# Altium PCB JacdacHub 39.PcbDoc
Units mm, origin at the board's own origin, x right, y up, seen from the top; angles counter-clockwise.
Board outline 24.18 x 46.54 mm, 2 copper layers (Top Layer, Bottom Layer), stack 1.525 mm thick; 20 components, 3 nets, 144 pads, 10 vias.
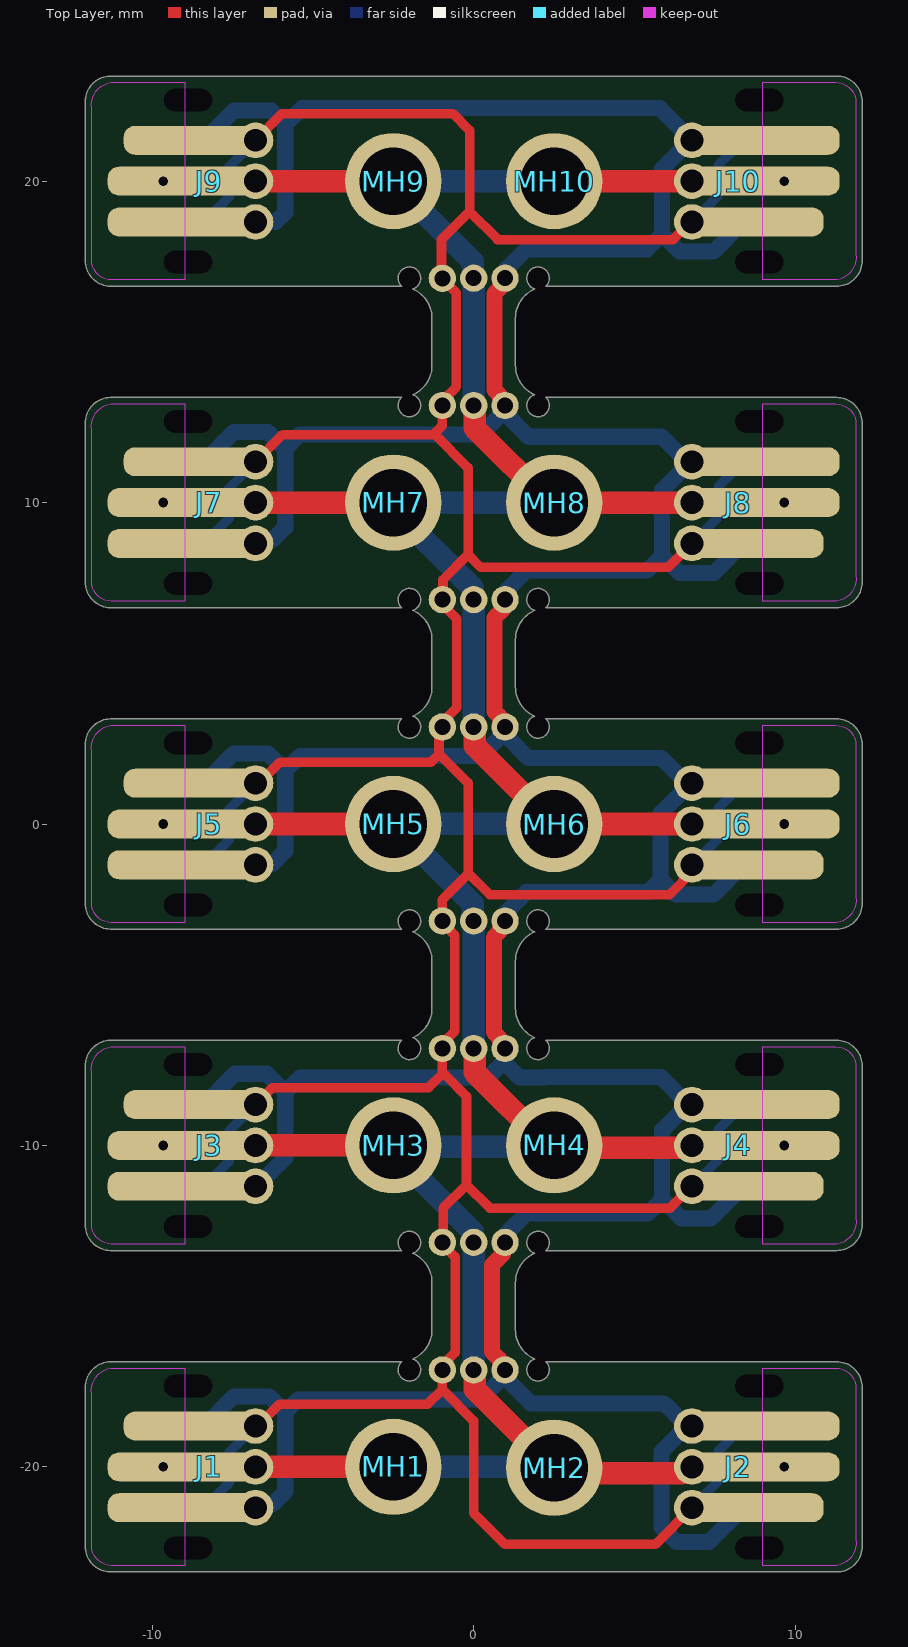
[diagram p0: Top Layer view]
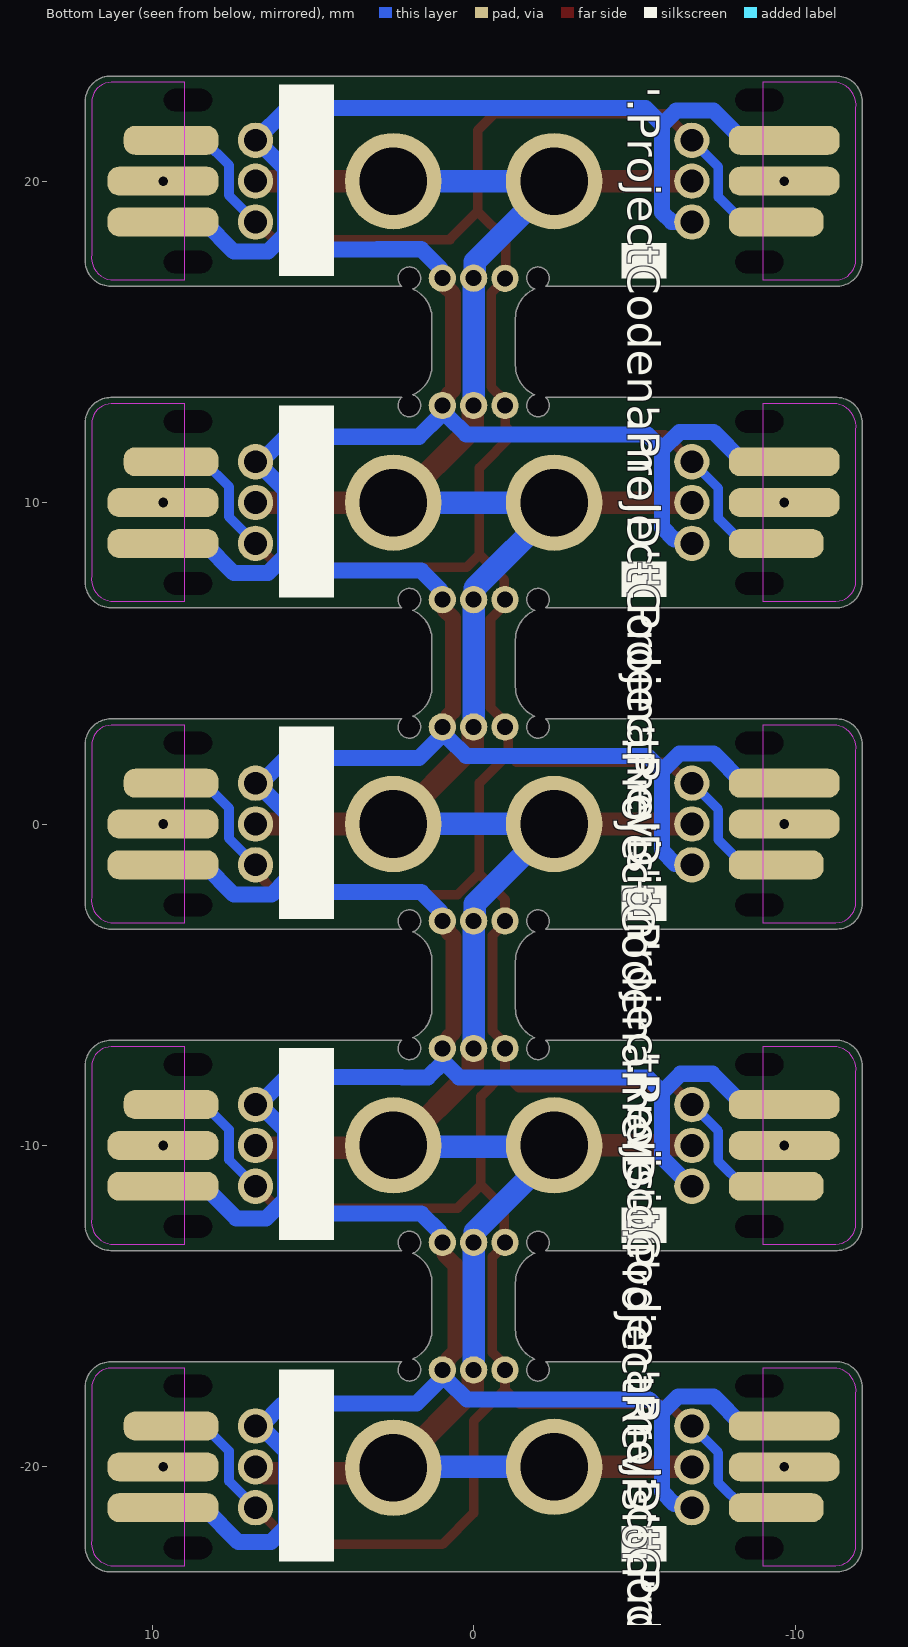
[diagram p1: Bottom Layer view, seen from below]

## Layer stack, top to bottom
Top Solder: solder mask 0.0102, Solder Resist, Dk 3.5
Top Layer: signal copper 0.0356
Dielectric 1: core 1.454, FR-4, Dk 4.2
Bottom Layer: signal copper 0.0356
Bottom Solder: solder mask 0.0102, Solder Resist, Dk 3.5

## Board outline
-12.088,-22.47 ccw(c-11.287,-22.469) -11.313,-23.27 11.288,-23.27 ccw(c11.288,-22.471) 12.087,-22.47 12.087,-17.53 ccw(c11.288,-17.529) 11.288,-16.73 2.331,-16.73 cw(c2.309,-14.857) 2.244,-16.729 cw(c2.001,-16.98) 1.897,-16.646 cw(c2.298,-15.73) 1.298,-15.73 1.298,-14.27 cw(c2.298,-14.27) 1.897,-13.354 cw(c2.001,-13.02) 2.244,-13.271 cw(c2.309,-15.142) 2.331,-13.27 11.288,-13.27 ccw(c11.288,-12.471) 12.087,-12.47 12.087,-7.53 ccw(c11.288,-7.529) 11.288,-6.73 2.331,-6.73 cw(c2.309,-4.856) 2.244,-6.729 cw(c2.001,-6.98) 1.897,-6.646 cw(c2.298,-5.73) 1.298,-5.73 1.298,-4.27 cw(c2.298,-4.27) 1.897,-3.354 cw(c2.001,-3.02) 2.244,-3.271 cw(c2.309,-5.137) 2.331,-3.27 11.288,-3.27 ccw(c11.288,-2.471) 12.087,-2.47 12.087,2.47 ccw(c11.288,2.471) 11.288,3.27 2.331,3.27 cw(c2.309,5.142) 2.244,3.271 cw(c2.001,3.02) 1.897,3.354 cw(c2.298,4.27) 1.298,4.27 1.298,5.73 cw(c2.298,5.73) 1.897,6.646 cw(c2.001,6.98) 2.244,6.729 cw(c2.309,4.863) 2.331,6.73 11.288,6.73 ccw(c11.288,7.529) 12.087,7.53 12.087,12.47 ccw(c11.288,12.471) 11.288,13.27 2.331,13.27 cw(c2.309,15.14) 2.244,13.271 cw(c2.001,13.02) 1.897,13.354 cw(c2.298,14.27) 1.298,14.27 1.298,15.73 cw(c2.298,15.73) 1.897,16.646 cw(c2.001,16.98) 2.244,16.729 cw(c2.309,14.864) 2.331,16.73 11.288,16.73 ccw(c11.288,17.529) 12.087,17.53 12.087,22.47 ccw(c11.288,22.471) 11.288,23.27 -11.313,23.27 ccw(c-11.287,22.469) -12.088,22.47 -12.088,17.53 ccw(c-11.287,17.531) -11.313,16.73 -2.331,16.73 cw(c-2.309,14.864) -2.244,16.729 cw(c-2.001,16.98) -1.897,16.646 cw(c-2.298,15.73) -1.298,15.73 -1.298,14.27 cw(c-2.298,14.27) -1.897,13.354 cw(c-2.001,13.02) -2.244,13.271 cw(c-2.309,15.141) -2.331,13.27 -11.313,13.27 ccw(c-11.287,12.469) -12.088,12.47 -12.088,7.53 ccw(c-11.287,7.531) -11.313,6.73 -2.331,6.73 cw(c-2.309,4.863) -2.244,6.729 cw(c-2.001,6.98) -1.897,6.646 cw(c-2.298,5.73) -1.298,5.73 -1.298,4.27 cw(c-2.298,4.27) -1.897,3.354 cw(c-2.001,3.02) -2.244,3.271 cw(c-2.309,5.142) -2.331,3.27 -11.313,3.27 ccw(c-11.287,2.469) -12.088,2.47 -12.088,-2.47 ccw(c-11.287,-2.469) -11.313,-3.27 -2.331,-3.27 cw(c-2.309,-5.137) -2.244,-3.271 cw(c-2.001,-3.02) -1.897,-3.354 cw(c-2.298,-4.27) -1.298,-4.27 -1.298,-5.73 cw(c-2.298,-5.73) -1.897,-6.646 cw(c-2.001,-6.98) -2.244,-6.729 cw(c-2.309,-4.856) -2.331,-6.73 -11.313,-6.73 ccw(c-11.287,-7.531) -12.088,-7.53 -12.088,-12.47 ccw(c-11.287,-12.469) -11.313,-13.27 -2.331,-13.27 cw(c-2.309,-15.138) -2.244,-13.271 cw(c-2.001,-13.02) -1.897,-13.354 cw(c-2.298,-14.27) -1.298,-14.27 -1.298,-15.73 cw(c-2.298,-15.73) -1.897,-16.646 cw(c-2.001,-16.98) -2.244,-16.729 cw(c-2.309,-14.858) -2.331,-16.73 -11.313,-16.73 ccw(c-11.287,-17.531) -12.088,-17.53

## Design rules (kind name [scope] priority, off if disabled: settings)
AssemblyTestPointUsage [All] p1: valid=2
BoardOutlineClearance [All] p1: gap=0.3 ignorepadtopadclearanceinfootprint=FALSE except(0: Arc-SplitContinuation Track-SplitContinuation SMDPad-SplitContinuation THPad-SplitContinuation Via-SplitContinuation Fill-SplitContinuation Poly-SplitContinuation Region-OutlineEdge Region-SplitContinuation Text-OutlineEdge Text-SplitContinuation; 0.25: THPad-OutlineEdge Fill-OutlineEdge Poly-OutlineEdge)
Clearance [All] p1: gap=0.125 ignorepadtopadclearanceinfootprint=FALSE except(0: Arc-Hole Track-Hole SMDPad-Hole THPad-Hole Via-Hole Fill-Hole Poly-Hole Region-Hole Text-Hole)
DiffPairsRouting [All] p1: maxlimit=2 minlimit=0.15 mostfreqgap=0.15 toplayer_minwidth=0.15 toplayer_maxwidth=2 toplayer_prefwidth=0.15 bottomlayer_minwidth=0.15 bottomlayer_maxwidth=2 bottomlayer_prefwidth=0.15 substack1={CB9D278B-8BF5-444A-AAF4-837A2A9DF42D} toplayer_{cb9d278b-8bf5-444a-aaf4-837a2a9df42d}_minwidth=0.381 toplayer_{cb9d278b-8bf5-444a-aaf4-837a2a9df42d}_maxwidth=0.381 toplayer_{cb9d278b-8bf5-444a-aaf4-837a2a9df42d}_prefwidth=0.381 bottomlayer_{cb9d278b-8bf5-444a-aaf4-837a2a9df42d}_minwidth=0.381 bottomlayer_{cb9d278b-8bf5-444a-aaf4-837a2a9df42d}_maxwidth=0.381 bottomlayer_{cb9d278b-8bf5-444a-aaf4-837a2a9df42d}_prefwidth=0.381 substack2={826B8647-A721-4255-895A-19F9591B9CD1} toplayer_{826b8647-a721-4255-895a-19f9591b9cd1}_minwidth=0.381 toplayer_{826b8647-a721-4255-895a-19f9591b9cd1}_maxwidth=0.381 toplayer_{826b8647-a721-4255-895a-19f9591b9cd1}_prefwidth=0.381 bottomlayer_{826b8647-a721-4255-895a-19f9591b9cd1}_minwidth=0.381 bottomlayer_{826b8647-a721-4255-895a-19f9591b9cd1}_maxwidth=0.381 bottomlayer_{826b8647-a721-4255-895a-19f9591b9cd1}_prefwidth=0.381 substack3={E64FCAF4-1BC8-437D-B1E0-0E5F2DC0F59E} toplayer_{e64fcaf4-1bc8-437d-b1e0-0e5f2dc0f59e}_minwidth=0.381 toplayer_{e64fcaf4-1bc8-437d-b1e0-0e5f2dc0f59e}_maxwidth=0.381 toplayer_{e64fcaf4-1bc8-437d-b1e0-0e5f2dc0f59e}_prefwidth=0.381 bottomlayer_{e64fcaf4-1bc8-437d-b1e0-0e5f2dc0f59e}_minwidth=0.381 bottomlayer_{e64fcaf4-1bc8-437d-b1e0-0e5f2dc0f59e}_maxwidth=0.381 bottomlayer_{e64fcaf4-1bc8-437d-b1e0-0e5f2dc0f59e}_prefwidth=0.381 substack4={E61CE66C-507C-4E1E-8E83-C905434AFC1C} toplayer_{e61ce66c-507c-4e1e-8e83-c905434afc1c}_minwidth=0.381 toplayer_{e61ce66c-507c-4e1e-8e83-c905434afc1c}_maxwidth=0.381 toplayer_{e61ce66c-507c-4e1e-8e83-c905434afc1c}_prefwidth=0.381 bottomlayer_{e61ce66c-507c-4e1e-8e83-c905434afc1c}_minwidth=0.381 bottomlayer_{e61ce66c-507c-4e1e-8e83-c905434afc1c}_maxwidth=0.381 bottomlayer_{e61ce66c-507c-4e1e-8e83-c905434afc1c}_prefwidth=0.381 maxuncoupledlength=25
FabricationTestPointUsage [All] p1: valid=2 allowmultiple=FALSE
HoleSize [All] p1: absolutevalues=TRUE maxlimit=2.54 minlimit=0.2 maxpercent=80.000 minpercent=20.000
MinimumSolderMaskSliver [All] p1: minsoldermaskwidth=0.005
PlaneClearance [All] p1: clearance=0.3
PlaneConnect [All] p1: planeconnectstyle=Relief reliefexpansion=0.5 reliefentries=4 reliefconductorwidth=0.2 reliefairgap=0.3
PolygonConnect "PolygonConnect GND" [isVIA] p1: connectstyle=Relief reliefconductorwidth=0.2 reliefentries=4 polygonreliefangle="90 Angle" airgapwidth=0.2
PolygonConnect [All] p2: connectstyle=Relief reliefconductorwidth=0.2 reliefentries=4 polygonreliefangle="90 Angle" airgapwidth=0.2
RoutingVias [All] p1: holewidth=0.3 width=0.6 viastyle="Through Hole" minholewidth=0.3 minwidth=0.6 maxholewidth=1 maxwidth=1.5
ShortCircuit ShortCircuit_J10_J11 [InComponent('J10') vs InComponent('J11')] p1: allowed=TRUE
ShortCircuit [All] p2: allowed=FALSE
SilkToSilkClearance [All] p1: silktosilkclearance=0.001
SilkToSolderMaskClearance [IsPad] p1: minsilkscreentomaskgap=0.05 clearancetoexposedcopper=TRUE
SolderMaskExpansion [All] p1: expansion=0.075 istentingtop=FALSE
Width [All] p1: maxlimit=2 minlimit=0.15 preferedwidth=0.15 substack1={CB9D278B-8BF5-444A-AAF4-837A2A9DF42D} substack2={826B8647-A721-4255-895A-19F9591B9CD1} substack3={E64FCAF4-1BC8-437D-B1E0-0E5F2DC0F59E} substack4={E61CE66C-507C-4E1E-8E83-C905434AFC1C} minimp=50.000000 maximp=50.000000 favimp=50.000000
20 further rules are at their usual default settings.

## Components (designator, comment, footprint, x,y, rotation, side; value= is the part's Value field where it differs from the comment)
J1 "3 pin JACDAC edge connector" JACDAC_EDGE_CONNECTOR_NO_TRACES -6.238,-20 r90 top
J2 "3 pin JACDAC edge connector" JACDAC_EDGE_CONNECTOR_NO_TRACES 6.237,-20 r270 top
J3 "3 pin JACDAC edge connector" JACDAC_EDGE_CONNECTOR_NO_TRACES -6.237,-10 r90 top
J4 "3 pin JACDAC edge connector" JACDAC_EDGE_CONNECTOR_NO_TRACES 6.237,-10 r270 top
J5 "3 pin JACDAC edge connector" JACDAC_EDGE_CONNECTOR_NO_TRACES -6.237,0 r90 top
J6 "3 pin JACDAC edge connector" JACDAC_EDGE_CONNECTOR_NO_TRACES 6.237,0 r270 top
J7 "3 pin JACDAC edge connector" JACDAC_EDGE_CONNECTOR_NO_TRACES -6.237,10 r90 top
J8 "3 pin JACDAC edge connector" JACDAC_EDGE_CONNECTOR_NO_TRACES 6.237,10 r270 top
J9 "3 pin JACDAC edge connector" JACDAC_EDGE_CONNECTOR_NO_TRACES -6.238,20 r90 top
J10 "3 pin JACDAC edge connector" JACDAC_EDGE_CONNECTOR_NO_TRACES 6.237,20 r270 top
MH1 "MH_5.0MMK_3.0MMC_2.1MMD_PTH" MH_5.0MMK_3.0MMC_2.1MMD_PTH_NO_NOTES#1 -2.5,-20 r0 top
MH2 "MH_5.0MMK_3.0MMC_2.1MMD_PTH" MH_5.0MMK_3.0MMC_2.1MMD_PTH_NO_NOTES#1 2.5,-20.025 r0 top
MH3 "MH_5.0MMK_3.0MMC_2.1MMD_PTH" MH_5.0MMK_3.0MMC_2.1MMD_PTH_NO_NOTES#2 -3,-10 r0 top
MH4 "MH_5.0MMK_3.0MMC_2.1MMD_PTH" MH_5.0MMK_3.0MMC_2.1MMD_PTH_NO_NOTES#3 3,-10 r0 top
MH5 "MH_5.0MMK_3.0MMC_2.1MMD_PTH" MH_5.0MMK_3.0MMC_2.1MMD_PTH_NO_NOTES#2 -3,0 r0 top
MH6 "MH_5.0MMK_3.0MMC_2.1MMD_PTH" MH_5.0MMK_3.0MMC_2.1MMD_PTH_NO_NOTES#3 3,0 r0 top
MH7 "MH_5.0MMK_3.0MMC_2.1MMD_PTH" MH_5.0MMK_3.0MMC_2.1MMD_PTH_NO_NOTES#2 -3,10 r0 top
MH8 "MH_5.0MMK_3.0MMC_2.1MMD_PTH" MH_5.0MMK_3.0MMC_2.1MMD_PTH_NO_NOTES#3 3,10 r0 top
MH9 "MH_5.0MMK_3.0MMC_2.1MMD_PTH" MH_5.0MMK_3.0MMC_2.1MMD_PTH_NO_NOTES#2 -3,20 r0 top
MH10 "MH_5.0MMK_3.0MMC_2.1MMD_PTH" MH_5.0MMK_3.0MMC_2.1MMD_PTH_NO_NOTES#4 3,20 r90 top

## Footprints (in the part's own frame and the unit in brackets; to place one, negate y for a bottom-side part, rotate by r counter-clockwise, add the part's x,y. Pads: shape width x height; smd on the part's side, far side on the other; paste and mask are expansions set on the pad)
JACDAC_EDGE_CONNECTOR_NO_TRACES [mm] "JacDac 3 pin connector with no traces"
  rrect78% 0.9x2.95 smd far side paste-1 mask+0: 1(-1.27,3.175)
  rrect78% 0.9x4.3 smd paste-1 mask+0: 1(1.27,2.5)
  round 1.11 / inner round 0.71 / far side round 1.1 hole 0.71 paste-0.254 mask+0: 1(1.27,0.55) 2(0,0.55) 3(-1.27,0.55)
  rrect78% 0.9x3.45 smd far side paste-1 mask+0: 2(0,3.425) 3(1.27,3.425)
  rrect78% 0.9x4.8 smd paste-1 mask+0: 2(0,2.75) 3(-1.27,2.75)
  round 0 hole 0.7 slot 1.5 at 90 deg unplated: ""(-2.52,2.65) ""(2.52,2.65)
  Top Layer keep-out region: -3.075,2.75 -3.07,5.033 -2.987,5.341 -2.761,5.567 -2.453,5.65 -2.453,5.65 2.27,5.65 2.545,5.635 2.794,5.516 2.978,5.31 3.07,5.05 3.07,5.05 3.07,2.75
  Bottom Layer lines w0.2: -1.27,0.85 -1.126,0.85
  Bottom Layer keep-out region: -3.07,2.75 -3.07,5.033 -3.023,5.269 -2.889,5.469 -2.689,5.603 -2.453,5.65 -2.453,5.65 2.27,5.65 2.545,5.635 2.794,5.516 2.978,5.31 3.07,5.05 3.07,5.05 3.07,2.75
MH_5.0MMK_3.0MMC_2.1MMD_PTH_NO_NOTES#1 [mm] "Mounting Hole 5.0mm clearance, 3.1 annualar ring and 2.1mm PTH"
  round 3 hole 2.1 mask+0.05: 1(0,0)
MH_5.0MMK_3.0MMC_2.1MMD_PTH_NO_NOTES#2 [mm] "Mounting Hole 5.0mm clearance, 3.1 annualar ring and 2.1mm PTH"
  round 3 hole 2.1 mask+0.05: 1(0.5,0)
MH_5.0MMK_3.0MMC_2.1MMD_PTH_NO_NOTES#3 [mm] "Mounting Hole 5.0mm clearance, 3.1 annualar ring and 2.1mm PTH"
  round 3 hole 2.1 mask+0.05: 1(-0.5,0)
MH_5.0MMK_3.0MMC_2.1MMD_PTH_NO_NOTES#4 [mm] "Mounting Hole 5.0mm clearance, 3.1 annualar ring and 2.1mm PTH"
  round 3 hole 2.1 mask+0.05: 1(0,0.5)

## Part data
J1 J2 J3 J4 J5 J6 J7 J8 J9 J10: library part "Jacdac edge connector", "3 pin Jacdac edge connector 1.27mm pitch", Manufacturer Part Number=JACDAC_EDGE_CONNECTOR, Checked By=?, ComponentLink1Description="Yuliang JACDAC cable connector drawing online", ComponentLink1URL=https://github.com/microsoft/jacdac-mdk/blob/main/connector/JACDAC-Connector-by-Yuliang-2020-11-28.pdf, ComponentLink2Description="JACDAC PCB edge connector spec onlin", ComponentLink2URL=https://github.com/microsoft/jacdac-mdk/blob/main/connector/JACDAC_PCB_Edge_Connector_Drawing_JD-PEC-01_rev_01.pdf, Created By="D. Gakure", PCB Type="1.6mm FR4"
MH1 MH2 MH3 MH4 MH5 MH6 MH7 MH8 MH9 MH10: "Mounting Hole 5.0mm keepout, 3.0mm annualar ring and 2.1mm Drill PTH"

## Free pads (board coordinates)
  round 0.85 hole 0.5: 1(-0.975,-16.984) 1(-0.975,-13.016) 1(-0.975,-6.984) 1(-0.975,-3.016) 1(-0.975,3.02) 1(-0.975,6.98) 1(-0.975,13.02) 1(-0.975,16.975) 2(0,-16.984) 2(0,-13.016) 2(0,-6.984) 2(0,-3.016) 2(0,3.02) 2(0,6.98) 2(0,13.02) 2(0,16.98) 3(0.975,-16.984) 3(0.975,-13.016) 3(0.975,-6.984) 3(0.975,-3.016) 3(0.975,3.02) 3(0.975,6.98) 3(0.975,13.02) 3(0.975,16.98)

## Via types
v1: diameter 0.6, hole 0.3, Top Layer to Bottom Layer, tented both sides, 10 vias

## Nets (pads, with @x,y where several pads share a name; then routed paths per layer and width w, separated by ;. In a path a pad name is that pad's centre, name@x,y a point inside that pad or via, vN(x,y) a via of type N, cw(c..) or ccw(c..) an arc to the next point about the centre after c; other vN are vias at no path point)
GND: J1.2 J2.2 J3.2 J4.2 J5.2 J6.2 J7.2 J8.2 J9.2 J10.2 MH1.1 MH2.1 MH3.1 MH4.1 MH5.1 MH6.1 MH7.1 MH8.1 MH9.1 MH10.1 pad.2 | length 118.5
  Top Layer w0.7: J3.2@-6.787,-10 MH3.1 ; J5.2@-6.787,0 MH5.1 MH5.1@-2,0 ; J7.2@-6.787,10 MH7.1@-2,10 ; J9.2@-6.788,20 MH9.1@-2,20 ; J1.2@-6.785,-19.998 MH1.1@-2.502,-19.998 ; pad.2@0,-16.984 0.029,-17.013 0.029,-17.581 MH2.1@2.33,-19.882 ; pad.2@0,-6.984 0.029,-7.012 0.029,-7.723 2.306,-10 MH4.1 2.567,-10.067 6.721,-10.067 J4.2@6.787,-10 ; pad.2@0,3.02 0.029,2.991 0.029,2.439 MH6.1@2.468,0 ; pad.2@0,13.02 0.029,12.991 0.029,12.323 MH8.1@2.352,10 ; MH10.1@2,20 J10.2@6.787,20 ; MH2.1 2.674,-20.199 6.477,-20.199 6.677,-20 J2.2@6.787,-20 ; MH6.1 J6.2@6.787,0 ; MH8.1 MH8.1@2.352,10 ; J8.2@6.787,10 MH8.1@2.352,10
  Bottom Layer w0.7: MH3.1 -2.5,-10.22 -0.869,-11.851 -0.867,-11.851 -0.029,-12.69 -0.029,-12.987 0,-13.016 pad.2@0,-16.984 ; MH5.1@-2.5,-0.017 -0.029,-2.489 -0.029,-2.988 0,-3.016 pad.2@0,-6.984 ; MH9.1@-2.5,19.962 -0.029,17.49 -0.029,17.009 0,16.98 pad.2@0,13.02 ; MH9.1 MH10.1 ; MH5.1@-2.485,0.015 MH6.1@2.485,0.015 ; MH1.1@-2.481,-20 MH2.1@2.655,-20 ; MH3.1@-2.459,-10.041 MH4.1@2.459,-10.041 ; pad.2@0,3.02 0,6.98 -0.029,7.009 -0.029,7.334 -2.5,9.805 MH7.1 MH8.1
  other v1: -9.663,-20 9.663,-20 -9.663,-10 9.663,-10 -9.663,0 9.663,0 -9.663,10 9.663,10 -9.663,20 9.663,20
JD_DATA: J1.1 J2.1 J3.1 J4.1 J5.1 J6.1 J7.1 J8.1 J9.1 J10.1 pad.1 | length 159.7
  Top Layer w0.2: J8.1@6.588,8.73 J8.1@6.787,8.73
  Top Layer w0.3: J1.1@-6.788,-18.73 -6.726,-18.73 -6.046,-18.05 -1.433,-18.05 -0.975,-17.592 ; J3.1@-6.787,-8.73 -6.257,-8.2 -1.4,-8.2 -1.01,-7.81 -0.886,-7.81 -0.225,-8.471 -0.225,-11.225 ; J5.1@-6.787,1.27 -6.676,1.27 -6.021,1.925 -1.325,1.925 -1.08,2.17 -1.08,2.18 ; J9.1@-6.788,21.27 -5.958,22.1 -0.65,22.1 -0.125,21.575 -0.125,19.054 ; J7.1@-6.646,11.27 -6.787,11.27 -5.946,12.111 -1.21,12.111 -0.175,11.076 -0.175,8.38 ; -1.238,12.111 -1.238,12.129 -0.98,12.387 -0.98,13 pad.1@-0.975,13.005 ; -0.975,-7.721 -0.975,-6.835 -0.585,-6.444 -0.585,-3.467 -0.975,-3.076 -0.975,-2.353 -0.175,-1.553 -0.175,1.275 -1.08,2.18 ; pad.1@-0.975,13.02 -0.975,13.169 -0.542,13.602 -0.542,16.524 -0.975,16.957 -0.975,16.975 -1,17 -1,18.179 -0.125,19.054 ; -0.175,-1.524 0.503,-2.201 6.087,-2.201 6.492,-1.796 6.492,-1.784 6.787,-1.489 J6.1@6.787,-1.27 ; J2.1@6.787,-21.27 5.649,-22.408 0.975,-22.408 0,-21.433 0,-18.567 -0.975,-17.592 ; J4.1@6.787,-11.27 6.108,-11.95 0.5,-11.95 -0.225,-11.225 ; J8.1@6.787,8.73 6.044,7.986 0.219,7.986 -0.175,8.38 ; J10.1@6.787,18.73 6.758,18.73 6.207,18.179 0.733,18.179 0.733,18.195 -0.125,19.054 ; -1.08,2.18 -1.08,2.915 -0.975,3.02 -0.975,3.169 -0.522,3.621 -0.522,6.379 -0.975,6.831 -0.975,6.98 -0.956,6.999 -0.956,7.599 -0.175,8.38 ; -0.975,-17.592 -0.975,-16.835 -0.579,-16.44 -0.579,-13.467 -0.975,-13.071 -0.975,-13.016 -0.95,-12.991 -0.95,-11.95 -0.225,-11.225
  Bottom Layer w0.3: J1.1@-9.413,-21.27 -8.388,-21.27 -7.613,-20.495 -7.613,-19.555 J1.1@-6.788,-18.73 ; J3.1@-9.413,-11.27 -8.388,-11.27 -7.613,-10.495 -7.613,-9.555 J3.1@-6.787,-8.73 ; J5.1@-9.413,-1.27 -8.388,-1.27 -7.613,-0.495 -7.613,0.445 J5.1@-6.787,1.27 ; J7.1@-9.413,8.73 -8.388,8.73 -7.613,9.505 -7.613,10.445 J7.1@-6.787,11.27 ; J9.1@-9.413,18.73 -8.388,18.73 -7.613,19.505 -7.613,20.445 J9.1@-6.788,21.27 ; J2.1@6.787,-21.27 7.613,-20.445 7.613,-19.505 8.388,-18.73 J2.1@9.413,-18.73 ; J4.1@6.787,-11.27 7.613,-10.445 7.613,-9.505 8.388,-8.73 J4.1@9.413,-8.73 ; J6.1@6.787,-1.27 7.613,-0.445 7.613,0.495 8.388,1.27 J6.1@9.413,1.27 ; J8.1@6.787,8.73 7.613,9.555 7.613,10.495 8.388,11.27 J8.1@9.413,11.27 ; J10.1@6.787,18.73 7.613,19.555 7.613,20.495 8.388,21.27 J10.1@9.413,21.27
JD_PWR: J1.3 J2.3 J3.3 J4.3 J5.3 J6.3 J7.3 J8.3 J9.3 J10.3 pad.3 | length 186.2
  Top Layer w0.34: J2.3@6.655,-18.597 J2.3@6.787,-18.73
  Top Layer w0.5: pad.3@0.975,-16.984 0.975,-16.889 0.8,-16.714 0.8,-16.653 0.566,-16.419 0.566,-13.723 0.908,-13.381 0.908,-13.083 pad.3@0.975,-13.016 ; pad.3@0.975,-6.984 0.975,-6.889 0.8,-6.714 0.8,-6.652 0.625,-6.477 0.625,-3.523 0.8,-3.348 0.8,-3.286 0.975,-3.111 pad.3@0.975,-3.016 ; pad.3@0.975,3.02 0.975,3.115 0.8,3.29 0.8,3.351 0.645,3.506 0.645,6.409 0.908,6.672 0.908,6.913 pad.3@0.975,6.98 ; pad.3@0.975,13.02 0.975,13.115 0.8,13.29 0.8,13.351 0.642,13.51 0.642,16.49 0.908,16.757 0.908,16.913 pad.3@0.975,16.98
  Bottom Layer w0.34: J5.3@-6.787,-1.27 J5.3@-6.692,-1.27
  Bottom Layer w0.5: J1.3@-9.663,-18.73 -8.388,-18.73 -7.463,-17.805 -6.365,-17.805 -5.863,-18.307 ; J3.3@-9.663,-8.73 -8.388,-8.73 -7.428,-7.77 -6.439,-7.77 -5.862,-8.347 ; J5.3@-9.663,1.27 -8.388,1.27 -7.462,2.195 -6.404,2.195 -5.862,1.653 ; J7.3@-9.663,11.27 -8.388,11.27 -7.462,12.195 -6.404,12.195 -5.862,11.653 ; J9.3@-9.663,21.27 -8.388,21.27 -7.463,22.195 -6.302,22.195 -5.862,21.756 ; J1.3@-6.788,-21.27 -6.673,-21.155 -6.247,-21.155 -5.863,-20.771 -5.863,-18.307 ; J3.3@-6.787,-11.27 -6.749,-11.27 -5.862,-10.383 -5.862,-8.347 ; J7.3@-6.787,8.73 -6.673,8.845 -6.247,8.845 -5.862,9.229 -5.862,11.653 ; J9.3@-6.788,18.73 -6.155,18.73 -5.862,19.023 -5.862,21.756 ; J5.3@-6.268,-1.245 -5.862,-0.84 -5.862,1.653 ; pad.3@0.8,-17.315 0.214,-17.901 -5.457,-17.901 -5.863,-18.307 ; pad.3@0.8,2.689 0.232,2.12 -5.395,2.12 -5.862,1.653 ; pad.3@0.8,12.689 0.232,12.12 -5.405,12.12 -5.862,11.663 -5.862,11.653 ; pad.3@0.975,-16.984 1.042,-17.051 1.042,-17.291 1.775,-18.025 5.889,-18.025 5.907,-18.043 5.938,-18.043 6.625,-18.73 J2.3@6.787,-18.73 ; pad.3@0.975,-13.016 1.042,-12.949 1.042,-12.709 1.63,-12.12 5.417,-12.12 5.862,-11.675 ; pad.3@0.975,-6.984 0.975,-7.358 pad.3@0.938,-7.396 ; pad.3@0.975,-3.016 1.042,-2.949 1.042,-2.709 1.63,-2.12 5.417,-2.12 5.814,-1.723 ; pad.3@0.975,3.02 1.042,2.953 1.042,2.709 1.704,2.047 5.848,2.047 6.625,1.27 J6.3@6.749,1.27 ; pad.3@0.975,6.98 1.042,7.047 1.042,7.291 1.63,7.88 5.395,7.88 5.862,8.347 ; pad.3@0.975,13.02 1.042,12.953 1.042,12.709 1.704,12.047 5.848,12.047 6.625,11.27 J8.3@6.749,11.27 ; pad.3@0.975,16.98 1.042,17.047 1.042,17.291 1.63,17.88 2.995,17.88 3,17.875 5.391,17.875 5.862,18.347 ; J2.3@6.395,-18.967 5.836,-19.526 5.836,-21.865 6.31,-22.339 7.319,-22.339 8.388,-21.27 J2.3@9.663,-21.27 ; J4.3@6.787,-8.73 J4.3@6.679,-8.73 ; J6.3@6.787,1.27 J6.3@6.749,1.27 ; J8.3@6.787,11.27 J8.3@6.749,11.27 ; J4.3@9.663,-11.27 8.388,-11.27 7.388,-12.27 6.458,-12.27 5.862,-11.675 ; J6.3@9.663,-1.27 8.388,-1.27 7.462,-2.195 6.286,-2.195 5.814,-1.723 ; J8.3@9.663,8.73 8.388,8.73 7.462,7.805 6.404,7.805 5.862,8.347 ; J10.3@9.663,18.73 8.388,18.73 7.462,17.805 6.404,17.805 5.862,18.347 ; -5.862,-8.347 -5.395,-7.88 0.454,-7.88 pad.3@0.938,-7.396 ; -5.862,21.756 -5.348,22.27 5.788,22.27 6.787,21.27 6.749,21.27 5.862,20.383 5.862,18.347 ; pad.3@0.938,-7.396 1.422,-7.88 2.222,-7.88 2.237,-7.865 5.814,-7.865 J4.3@6.679,-8.73 ; 5.814,-1.723 5.814,0.335 J6.3@6.749,1.27 ; 5.862,-11.675 5.862,-9.523 6.656,-8.73 J4.3@6.679,-8.73 ; 5.862,8.347 5.862,10.383 J8.3@6.749,11.27
pads on no net: J1. J2. J3. J4. J5. J6. J7. J8. J9. J10.

## Other copper
Top Layer:
  text "Top Layer" at 30.376,23.7 h1.7
Bottom Layer:
  text "Bottom Layer" at 30.375,22.2 h1.7

## Silkscreen, mask and mechanical layers (free items; w line width, h text height)
Top Overlay:
  text "Top Overlay" at 30.376,15.4 h1.7
Bottom Overlay:
  region: 4.35,-6.975 4.35,-12.949 6.05,-12.949 6.05,-6.975
  region: -6,-11.934 -6,-13.034 -4.6,-13.034 -4.6,-11.934
  region: 4.35,-16.975 4.35,-22.949 6.05,-22.949 6.05,-16.975
  region: 4.35,3.025 4.35,-2.949 6.05,-2.949 6.05,3.025
  region: 4.35,13.025 4.35,7.051 6.05,7.051 6.05,13.025
  region: 4.35,23 4.35,17.05 6.05,17.05 6.05,23
  region: -6,18.072 -6,16.972 -4.6,16.972 -4.6,18.072
  region: -6,8.163 -6,7.063 -4.6,7.063 -4.6,8.163
  region: -6,-21.837 -6,-22.937 -4.6,-22.937 -4.6,-21.837
  region: -6,-1.915 -6,-3.015 -4.6,-3.015 -4.6,-1.915
  text "'.ProjectCodenameID'-'.ProjectRevision'" at -4.8,22.95 h1 r90
  text "Bottom Overlay" at 30.375,13.9 h1.7
  text "'.ProjectCodenameID'-'.ProjectRevision'" at -4.8,13.05 h1 r90
  text "'.ProjectCodenameID'-'.ProjectRevision'" at -4.64,3.11 h1 r90
  text "'.ProjectCodenameID'-'.ProjectRevision'" at -4.8,-7.05 h1 r90
  text "'.ProjectCodenameID'-'.ProjectRevision'" at -4.8,-16.95 h1 r90
Top Paste:
  text "Top Paste" at 30.376,12.493 h1.7
Bottom Paste:
  text "Bottom Paste" at 30.375,11.015 h1.7
Top Solder:
  text "Top Solder (resist)" at 30.376,9.693 h1.7
Bottom Solder:
  text "Bottom Solder (resist)" at 30.375,8.202 h1.7
Mechanical 1:
  circle w0.013: c6.787,-18.73 r0.355
  circle w0.013: c6.787,-21.27 r0.355
  circle w0.013: c6.787,-20 r0.355
  circle w0.013: c2.5,-20 r1.05
  circle w0.013: c0.975,-16.98 r0.25
  circle w0.013: c0.975,-13.02 r0.25
  circle w0.013: c0,-13.02 r0.25
  circle w0.013: c6.787,-11.27 r0.355
  circle w0.013: c6.787,-8.73 r0.355
  circle w0.013: c6.787,-10 r0.355
  circle w0.013: c2.5,-10 r1.05
  circle w0.013: c0.975,-6.98 r0.25
  circle w0.013: c0.975,-3.025 r0.25
  circle w0.013: c0,-6.98 r0.25
  circle w0.013: c6.787,-1.27 r0.355
  circle w0.013: c-0.975,-16.98 r0.25
  circle w0.013: c0,-16.98 r0.25
  circle w0.013: c-0.975,-13.02 r0.25
  circle w0.013: c-2.5,-10 r1.05
  circle w0.013: c-2.5,-20 r1.05
  circle w0.013: c-6.788,-20 r0.355
  circle w0.013: c-6.788,-21.27 r0.355
  circle w0.013: c-6.788,-8.73 r0.355
  circle w0.013: c-6.788,-18.73 r0.355
  circle w0.013: c-6.788,-10 r0.355
  circle w0.013: c-6.788,-11.27 r0.355
  circle w0.013: c0,-3.02 r0.25
  circle w0.013: c-0.975,-3.02 r0.25
  circle w0.013: c-0.975,-6.98 r0.25
  circle w0.013: c-6.788,-1.27 r0.355
  circle w0.013: c-6.788,1.27 r0.355
  circle w0.013: c-0.975,6.98 r0.25
  circle w0.013: c-0.975,3.02 r0.25
  circle w0.013: c0,3.02 r0.25
  circle w0.013: c-6.788,11.27 r0.355
  circle w0.013: c-6.788,10 r0.355
  circle w0.013: c-6.788,18.73 r0.355
  circle w0.013: c-6.788,8.73 r0.355
  circle w0.013: c-6.788,21.27 r0.355
  circle w0.013: c-6.788,20 r0.355
  circle w0.013: c-2.5,20 r1.05
  circle w0.013: c-2.5,10 r1.05
  circle w0.013: c-0.975,13.02 r0.25
  circle w0.013: c0,16.98 r0.25
  circle w0.013: c-0.975,16.98 r0.25
  circle w0.013: c6.787,1.27 r0.355
  circle w0.013: c0,6.98 r0.25
  circle w0.013: c0.975,3.025 r0.25
  circle w0.013: c0.975,6.98 r0.25
  circle w0.013: c2.5,10 r1.05
  circle w0.013: c6.787,10 r0.355
  circle w0.013: c6.787,8.73 r0.355
  circle w0.013: c6.787,11.27 r0.355
  circle w0.013: c0,13.02 r0.25
  circle w0.013: c0.975,13.02 r0.25
  circle w0.013: c0.975,16.98 r0.25
  circle w0.013: c2.5,20 r1.05
  circle w0.013: c6.787,20 r0.355
  circle w0.013: c6.787,21.27 r0.355
  circle w0.013: c6.787,18.73 r0.355
  lines w0.013: -9.288,-22.87 cw(c-9.288,-22.52) -9.288,-22.17 -8.488,-22.17 cw(c-8.488,-22.52) -8.488,-22.87 -9.288,-22.87 ; -9.288,-17.83 cw(c-9.288,-17.48) -9.288,-17.13 -8.488,-17.13 cw(c-8.488,-17.48) -8.488,-17.83 -9.288,-17.83 ; -9.288,-12.87 cw(c-9.288,-12.52) -9.288,-12.17 -8.488,-12.17 cw(c-8.488,-12.52) -8.488,-12.87 -9.288,-12.87 ; -9.288,-7.83 cw(c-9.288,-7.48) -9.288,-7.13 -8.488,-7.13 cw(c-8.488,-7.48) -8.488,-7.83 -9.288,-7.83 ; -9.288,-2.87 cw(c-9.288,-2.52) -9.288,-2.17 -8.488,-2.17 cw(c-8.488,-2.52) -8.488,-2.87 -9.288,-2.87 ; -9.288,2.17 cw(c-9.288,2.52) -9.288,2.87 -8.488,2.87 cw(c-8.488,2.52) -8.488,2.17 -9.288,2.17 ; -9.288,7.13 cw(c-9.288,7.48) -9.288,7.83 -8.488,7.83 cw(c-8.488,7.48) -8.488,7.13 -9.288,7.13 ; -9.288,12.17 cw(c-9.288,12.52) -9.288,12.87 -8.488,12.87 cw(c-8.488,12.52) -8.488,12.17 -9.288,12.17 ; -9.288,17.13 cw(c-9.288,17.48) -9.288,17.83 -8.488,17.83 cw(c-8.488,17.48) -8.488,17.13 -9.288,17.13 ; -9.288,22.17 cw(c-9.288,22.52) -9.288,22.87 -8.488,22.87 cw(c-8.488,22.52) -8.488,22.17 -9.288,22.17 ; -7.143,0 ccw(c-6.788,0) -6.433,0 ccw(c-6.788,0) -7.143,0 ; -3.55,0 ccw(c-2.5,0) -1.45,0 ccw(c-2.5,0) -3.55,0 ; 1.45,0 ccw(c2.5,0) 3.55,0 ccw(c2.5,0) 1.45,0 ; 6.432,0 ccw(c6.787,0) 7.143,0 ccw(c6.787,0) 6.432,0 ; 8.487,-22.87 cw(c8.487,-22.52) 8.487,-22.17 9.287,-22.17 cw(c9.287,-22.52) 9.287,-22.87 8.487,-22.87 ; 8.487,-17.83 cw(c8.487,-17.48) 8.487,-17.13 9.287,-17.13 cw(c9.287,-17.48) 9.287,-17.83 8.487,-17.83 ; 8.487,-12.87 cw(c8.487,-12.52) 8.487,-12.17 9.287,-12.17 cw(c9.287,-12.52) 9.287,-12.87 8.487,-12.87 ; 8.487,-7.83 cw(c8.487,-7.48) 8.487,-7.13 9.287,-7.13 cw(c9.287,-7.48) 9.287,-7.83 8.487,-7.83 ; 8.488,-2.87 cw(c8.488,-2.52) 8.488,-2.17 9.287,-2.17 cw(c9.287,-2.52) 9.287,-2.87 8.488,-2.87 ; 8.488,2.17 cw(c8.488,2.52) 8.488,2.87 9.287,2.87 cw(c9.287,2.52) 9.287,2.17 8.488,2.17 ; 8.487,7.13 cw(c8.487,7.48) 8.487,7.83 9.287,7.83 cw(c9.287,7.48) 9.287,7.13 8.487,7.13 ; 8.487,12.17 cw(c8.487,12.52) 8.487,12.87 9.287,12.87 cw(c9.287,12.52) 9.287,12.17 8.487,12.17 ; 8.487,17.13 cw(c8.487,17.48) 8.487,17.83 9.287,17.83 cw(c9.287,17.48) 9.287,17.13 8.487,17.13 ; 8.487,22.17 cw(c8.487,22.52) 8.487,22.87 9.287,22.87 cw(c9.287,22.52) 9.287,22.17 8.487,22.17
Fab Notes:
  lines w0.1: -10.507,-16.657 -9.907,-17.257 ; -10.507,-11.707 -9.907,-12.307 ; -10.507,-1.582 -9.907,-2.182 ; -10.5,8.318 -9.9,7.718 ; -10.5,27.025 -10.5,23.4 ; -10.482,-6.607 -9.882,-7.207 ; -10.482,3.368 -9.882,2.768 ; -10.482,13.268 -9.882,12.668 ; -9.9,-22.45 -10.5,-21.85 -10.5,18.005 ; -9.9,17.405 -10.5,18.005 ; -9.775,22.675 -10.5,23.4 ; -8.049,24.468 -8.399,24.818 ; -8.049,25.168 -8.399,24.818 ; -5.425,-26 -5.425,27 ; -5.42,24.818 -8.399,24.818 ; 5.163,24.825 8.142,24.825 ; 5.175,-27 5.175,27 ; 7.791,24.475 8.142,24.825 ; 7.791,25.175 8.142,24.825 ; 9.543,22.757 10.268,23.482 ; 9.65,-7.125 10.25,-6.525 ; 9.65,2.85 10.25,3.45 ; 9.65,12.75 10.25,13.35 ; 9.668,-22.368 10.268,-21.768 10.268,18.087 ; 9.668,7.8 10.268,8.4 ; 9.668,17.487 10.268,18.087 ; 9.675,-17.175 10.275,-16.575 ; 9.675,-12.225 10.275,-11.625 ; 9.675,-2.1 10.275,-1.5 ; 10.268,27.075 10.268,23.482 ; -10.5,18.005 -10.5,23.4 ; 10.268,18.087 10.268,23.482
  text "no board edge pips/ / rat's teeth/mouse bites  / above  this line - make  / sure board edge is clean" at -2.875,27.3 h1.7 r90
  text "no board edge pips/ / rat's teeth/mouse bites  / below  this line - make  / sure board edge is clean" at 7.725,27.2 h1.7 r90
  text "non-plated slots x14" at 10.607,27.101 h1.7 r90
  text "non-plated slots x14" at -10.169,27.014 h1.7 r90
  text "Fabrication Notes" at 30.375,20.915 h1.7
Board Outline:
  the board outline again, w0.1
  text "Board Outline" at 30.375,19.615 h1.7
Top Assy:
  text "Top Assy" at 30.376,18.3 h1.7
Bottom Assy:
  text "Bottom Assy" at 30.375,16.9 h1.7

## Dimensions
-9.206,-3.27 to -9.105,3.27 on Dimension
-2.5,-20 to -2.5,20 on Dimension
0.675,23.275 to 0.225,-23.275 on Dimension
-2.5,20 to -2.5,10 on Dimension
-12.089,20.416 to 12.075,19.875 on Dimension
-2.5,20 to 2.5,20 on Dimension

## Text inside footprints (layer, text, board x,y; h text height)
J1: Alignment "board outline  / for 'outie'" at -7.101,-14.86 h1.2 r90; Alignment "board outline  / for 'innie'" at -4.256,-15.47 h1.2 r90; Mechanical 9 "Jacdac / cable connector  / body" at -16.245,-24.821 h1.7 r90
J2: Alignment "board outline  / for 'innie'" at 4.256,-24.53 h1.2 r270; Alignment "board outline  / for 'outie'" at 7.101,-25.14 h1.2 r270; Mechanical 9 "Jacdac / cable connector  / body" at 16.245,-15.179 h1.7 r270
J3: Alignment "board outline  / for 'innie'" at -4.256,-5.47 h1.2 r90; Alignment "board outline  / for 'outie'" at -7.101,-4.86 h1.2 r90; Mechanical 9 "Jacdac / cable connector  / body" at -16.245,-14.821 h1.7 r90
J4: Alignment "board outline  / for 'outie'" at 7.101,-15.14 h1.2 r270; Alignment "board outline  / for 'innie'" at 4.256,-14.53 h1.2 r270; Mechanical 9 "Jacdac / cable connector  / body" at 16.245,-5.179 h1.7 r270
J5: Alignment "board outline  / for 'innie'" at -4.256,4.53 h1.2 r90; Alignment "board outline  / for 'outie'" at -7.101,5.14 h1.2 r90; Mechanical 9 "Jacdac / cable connector  / body" at -16.245,-4.821 h1.7 r90
J6: Alignment "board outline  / for 'outie'" at 7.101,-5.14 h1.2 r270; Alignment "board outline  / for 'innie'" at 4.256,-4.53 h1.2 r270; Mechanical 9 "Jacdac / cable connector  / body" at 16.245,4.821 h1.7 r270
J7: Alignment "board outline  / for 'innie'" at -4.256,14.53 h1.2 r90; Alignment "board outline  / for 'outie'" at -7.101,15.14 h1.2 r90; Mechanical 9 "Jacdac / cable connector  / body" at -16.245,5.179 h1.7 r90
J8: Alignment "board outline  / for 'outie'" at 7.101,4.86 h1.2 r270; Alignment "board outline  / for 'innie'" at 4.256,5.47 h1.2 r270; Mechanical 9 "Jacdac / cable connector  / body" at 16.245,14.821 h1.7 r270
J9: Alignment "board outline  / for 'outie'" at -7.101,25.14 h1.2 r90; Alignment "board outline  / for 'innie'" at -4.256,24.53 h1.2 r90; Mechanical 9 "Jacdac / cable connector  / body" at -16.245,15.179 h1.7 r90
J10: Alignment "board outline  / for 'innie'" at 4.256,15.47 h1.2 r270; Alignment "board outline  / for 'outie'" at 7.101,14.86 h1.2 r270; Mechanical 9 "Jacdac / cable connector  / body" at 16.245,24.821 h1.7 r270